# Altium PCB PCB1.PcbDoc
Units mil, origin at the board's own origin, x right, y up, seen from the top; angles counter-clockwise.
Board outline 3535 x 2720 mil, 2 copper layers (Top Layer, Bottom Layer); 29 components, 37 nets, 167 pads, 90 vias.
Unrouted connection lines stored in the file: 2.
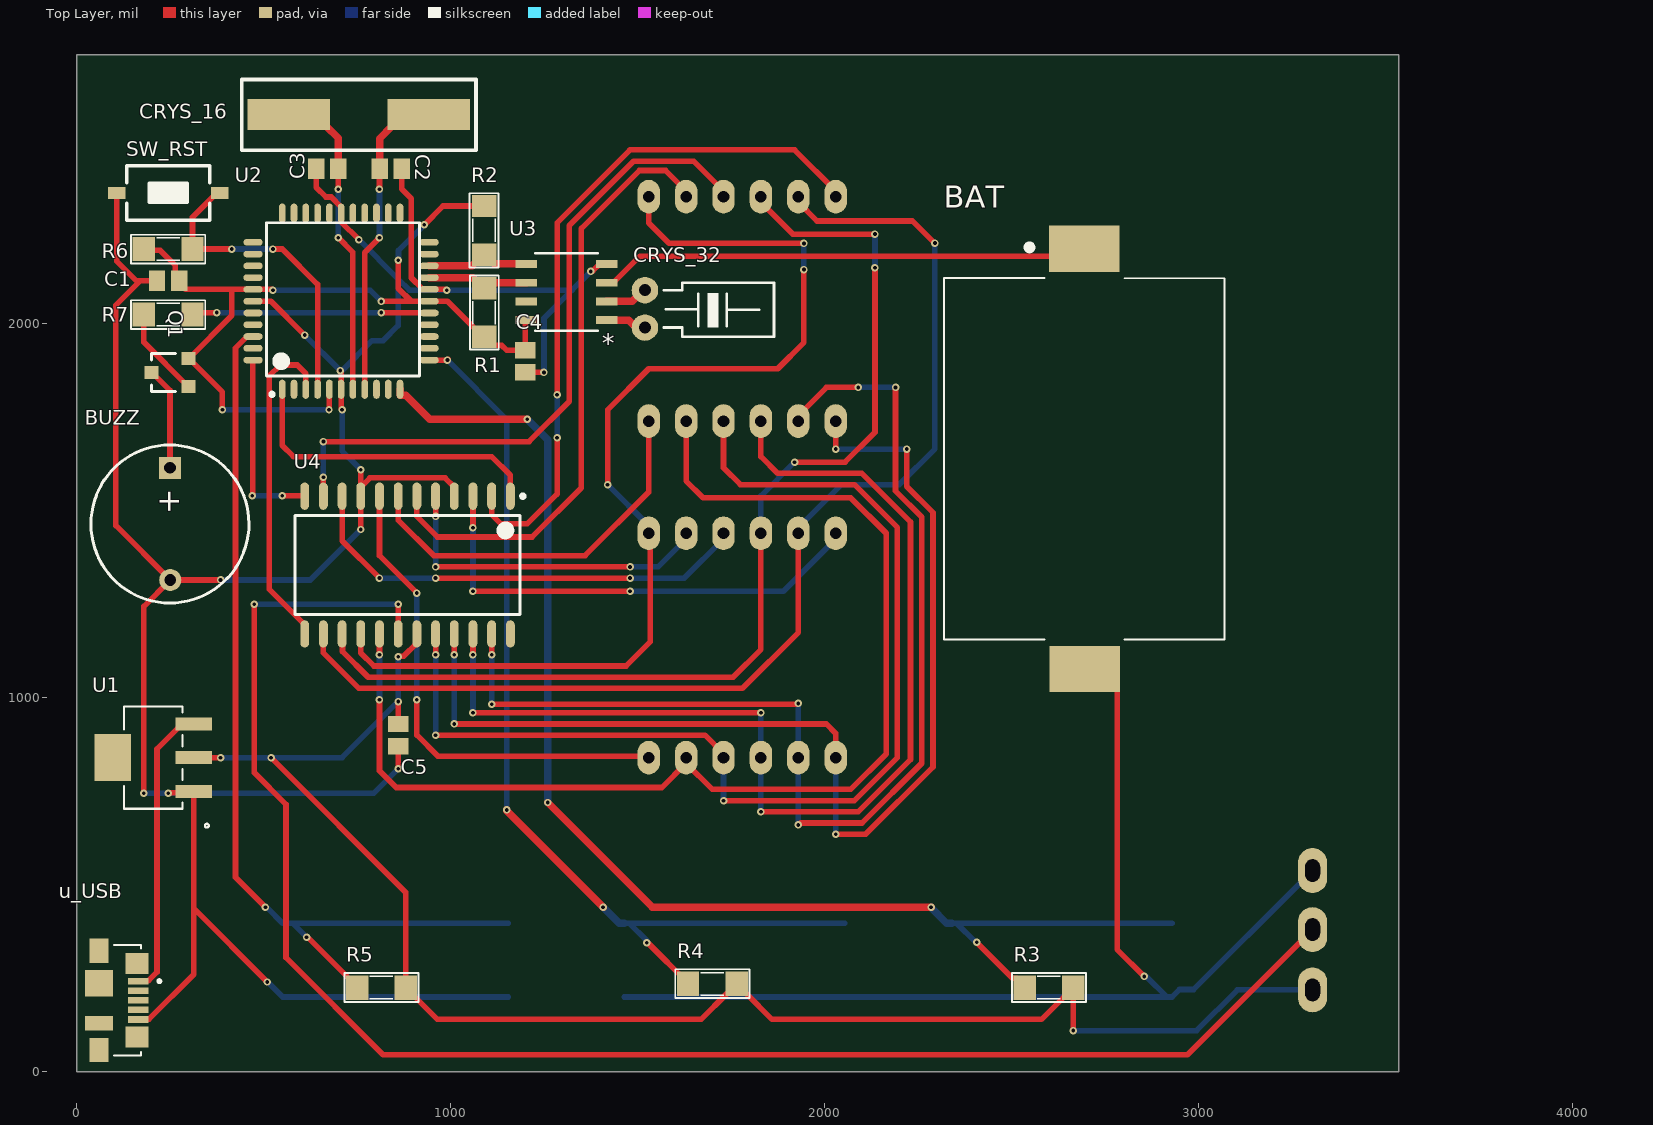
[diagram p0: Top Layer view]
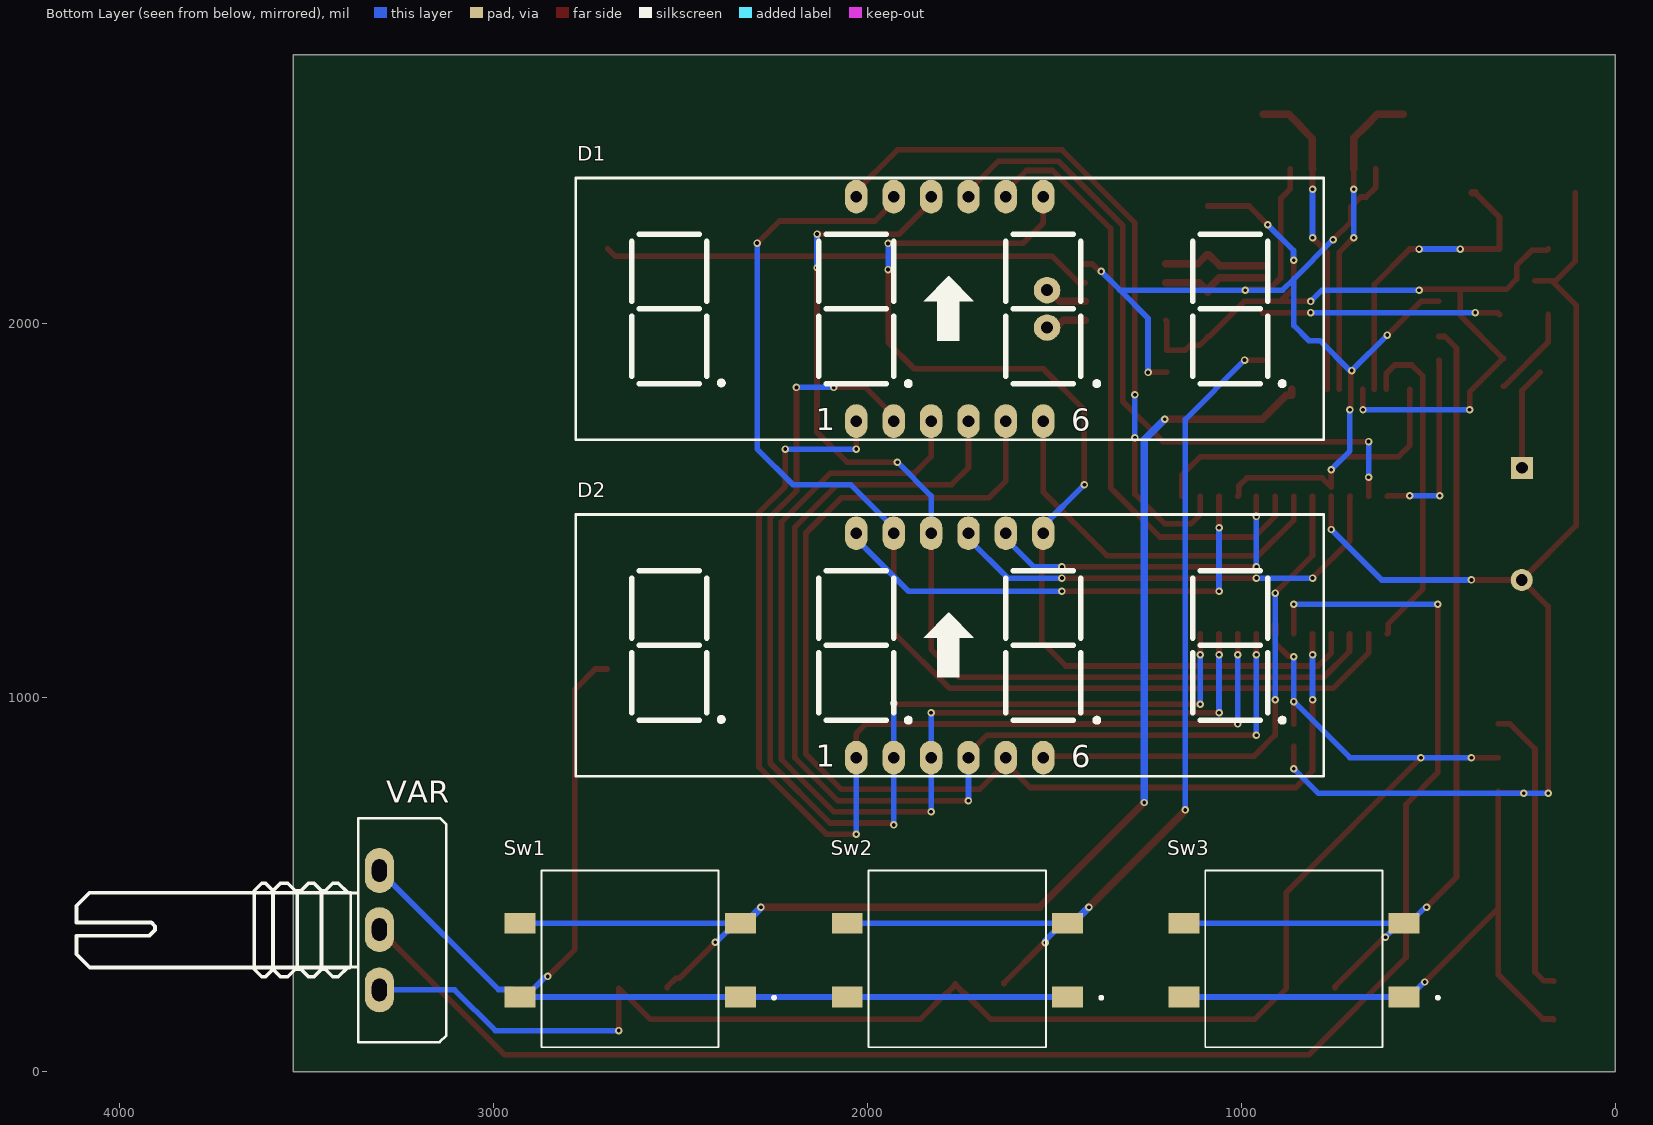
[diagram p1: Bottom Layer view, seen from below]

## Layer stack, top to bottom
Top Solder: solder mask 0.4, Solder Resist, Dk 3.5
Top Layer: signal copper 1.4
Dielectric 1: dielectric 12.6, FR-4, Dk 4.8
Bottom Layer: signal copper 1.4
Bottom Solder: solder mask 0.4, Solder Resist, Dk 3.5

## Board outline
0,0 3535,0 3535,2720 0,2720

## Design rules (kind name [scope] priority, off if disabled: settings)
Clearance [All] p1: gap=5 ignorepadtopadclearanceinfootprint=FALSE
PolygonConnect [All] p1: connectstyle=Relief reliefconductorwidth=10 reliefentries=4 polygonreliefangle="90 Angle" airgapwidth=10
RoutingVias [All] p1: holewidth=10 width=20 viastyle="Through Hole" minholewidth=10 minwidth=20 maxholewidth=10 maxwidth=20
SolderMaskExpansion [All] p1: expansion=4 istentingtop=FALSE
Width [All] p1: maxlimit=40 minlimit=10 preferedwidth=20
30 further rules are at their usual default settings.

## Components (designator, comment, footprint, x,y, rotation, side; value= is the part's Value field where it differs from the comment)
BAT "796136-1" TE_796136-1 2695,1655 r270 top
BUZZ "Buzzer" SPEAKER 250,1615 r270 top
C1 "0.1uF" C0805 245,2115 r0 top value=33p
C2 "22pF" C0805 840,2415 r0 top value=33p
C3 "22pF" C0805 670.47,2415 r180 top value=33p
C4 "0.1uF" C0805 1200,1900 r90 top value=33p
C5 "0.1uF" C0805 860,900 r90 top value=33p
CRYS_16 "16MHz" ABLS2-8.000MHZ-D4Y-T 755,2560 r0 top value=8MHz
CRYS_32 "32.768Khz" XT32k 1520,2090 r0 top value=4Mhz
D1 "Above" 7SEGQ 2030,1740 r180 bottom value="LED 7Q SEG"
D2 "Below" 7SEGQ 2030,840 r180 bottom value="LED 7Q SEG"
Q1 "SA1015" SOT23-321 250,1870 r90 top value=A1015
R1 "4k7" SM-RES-1206 1090,2095 r270 top value="R1/4W - 1K"
R2 "4k7" SM-RES-1206 1090,2185 r90 top value="R1/4W - 1K"
R3 "1k" SM-RES-1206 2535,225 r0 top value="R1/4W - 1K"
R4 "1k" SM-RES-1206 1635,235 r0 top value="R1/4W - 1K"
R5 "1k" SM-RES-1206 750,225 r0 top value="R1/4W - 1K"
R6 "1k" SM-RES-1206 310,2200 r180 top value="R1/4W - 1K"
R7 "1k" SM-RES-1206 310,2025 r180 top value="R1/4W - 1K"
Sw1 "Mode" SW_1571527-1 2634,293.58 r0 bottom (schematic designator SW1)
Sw2 "Adjust" SW_1571527-1 1759,293.58 r0 bottom (schematic designator SW2)
Sw3 "Increase" SW_1571527-1 859,293.58 r0 bottom (schematic designator SW3)
SW_RST "RST" SW1-SMD 245,2350 r0 top value="SW chip 2 pin"
U1 "AMS1117" SOT_AMS_ADS 205,840 r90 top
U2 "ATmega32A-AU" TQFP44 707.48,2060.47 r90 top
U3 "ds1307zn+" 21-0041B_8_MXM 1310,2085 r180 top
U4 "MAX7219ENG" SO24 885,1355 r270 top
u_USB "Micro-USB" MOLEX_47346-0001 60,191.02 r270 top
VAR "10K" VR-S1 3305,379 r270 bottom value="Volume 50k"

## Footprints (in the part's own frame and the unit in brackets; to place one, negate y for a bottom-side part, rotate by r counter-clockwise, add the part's x,y. Pads: shape width x height; smd on the part's side, far side on the other; paste and mask are expansions set on the pad)
7SEGQ [mil] "DIP 12 Leads; Body 48 x 20 mm; Pitch 0.5 mm"
  oval 60x90 hole 31: 1(0,0) 2(100,0) 3(200,0) 4(300,0) 5(400,0) 6(500,0) 7(500,600) 8(400,600) 9(300,600) 10(200,600) 11(100,600) 12(0,600)
  silkscreen extent -750,-50 1250,650, body extent -720,-80 1260,668, height 565
21-0041B_8_MXM [mil]
  rect 57.5x21 smd paste+0 mask+0: 1(-107.25,75) 2(-107.25,25) 3(-107.25,-25) 4(-107.25,-75) 5(107.25,-75) 6(107.25,-25) 7(107.25,25) 8(107.25,75)
  silkscreen extent -84,-104 84,104, body extent -122,-99 122,99, height 69
ABLS2-8.000MHZ-D4Y-T [mm]
  rect 5.6x2.1 smd: 1(-4.75,0) 2(4.75,0)
  silkscreen extent -7.95,-2.44 7.95,2.36
C0805 [mm] "Chip Capacitor, Body 2.0x1.3mm, IPC High Density"
  rect 1.1x1.4 smd: 1(-0.75,0) 2(0.75,0)
  body extent -1.1,-0.72 1.1,0.72, height 1.4
MOLEX_47346-0001 [mm]
  rect 0.45x1.38 smd: 1(-1.3,2.66) 2(-0.65,2.66) 3(0,2.66) 4(0.65,2.66) 5(1.3,2.66)
  rect 1.425x1.55 smd: S1(-2.487,2.575) S2(2.488,2.575)
  rect 1.65x1.3 smd: S3(-3.375,0) S6(3.375,0)
  rect 1.8x1.9 smd: S4(-1.15,0)
  rect 1x1.9 smd: S5(1.55,0)
  silkscreen extent -3.75,1 3.75,4.2, body extent -4.18,-2.93 4.18,2.5, height 2.7
SM-RES-1206 [mil]
  rect 60x65 smd: 1(0,0) 2(130,0)
  silkscreen extent -34,-38 164,39, body extent 2,-31 128,32, height 40
SO24 [mm] "SOIC, 24-Leads, Body 15.30x7.50mm, Pitch 1.27mm, IPC Medium Density"
  oval 1.85x0.6 smd: 1(-4.675,6.985) 2(-4.675,5.715) 3(-4.675,4.445) 4(-4.675,3.175) 5(-4.675,1.905) 6(-4.675,0.635) 7(-4.675,-0.635) 8(-4.675,-1.905) 9(-4.675,-3.175) 10(-4.675,-4.445) 11(-4.675,-5.715) 12(-4.675,-6.985) 13(4.675,-6.985) 14(4.675,-5.715) 15(4.675,-4.445) 16(4.675,-3.175) 17(4.675,-1.905) 18(4.675,-0.635) 19(4.675,0.635) 20(4.675,1.905) 21(4.675,3.175) 22(4.675,4.445) 23(4.675,5.715) 24(4.675,6.985)
  silkscreen extent -4.8,-7.65 3.35,7.96, body extent -5.2,-7.83 5.2,7.57, height 2.6
SOT23-321 [mm]
  rect 0.9x0.95 smd mask+0: 1(0.95,-1.25)
  rect 0.9x0.95 smd: 2(0,1.25) 3(-0.95,-1.25)
  silkscreen extent -1.3,-0.38 1.3,1.25, body extent -1.52,-1.23 1.48,1.27, height 1.06
SOT_AMS_ADS [mil]
  rect 35x98 smd paste+0 mask+0: 1(-90.16,-108.5) 2(0,-108.5) 3(90.16,-108.5)
  rect 126x98 smd paste+0 mask+0: 4(0,108.5)
  silkscreen extent -187,-148 137,78, body extent -132,-143 132,144, height 71
SPEAKER [mm]
  rect 1.5x1.5 hole 0.8: 1(0,0)
  round 1.5 hole 0.8: 2(7.62,0.013)
  silkscreen extent -1.55,-5.38 9.18,5.36, body extent -2.22,-6 13.24,6, height 3.5
SW1-SMD [mm]
  rect 1.2x0.8 smd: 1(-3.5,0) 2(3.5,0)
  silkscreen extent -2.82,-1.85 2.82,1.85, body extent -3.05,-1.85 3.05,1.85, height 2.5
SW_1571527-1 [mm]
  rect 2.1x1.4 smd: 1(-7.468,2.377) 2(7.496,2.377) 3(-7.468,-2.623) 4(7.496,-2.623)
  silkscreen extent -9.85,-6.22 6.05,5.79
TE_796136-1 [mm]
  rect 3.15x4.78 smd: 1(-13.868,0) 2(14.681,0.025)
  silkscreen extent -14.16,-9.53 12.67,9.53
TQFP44 [mm] "TQFP, 44-Leads, Body 10X10mm, Pitch 0.80mm, IPC High Density"
  oval 1.3x0.45 smd: 1(-5.981,4) 2(-5.981,3.2) 3(-5.981,2.4) 4(-5.981,1.6) 5(-5.981,0.8) 6(-5.981,0) 7(-5.981,-0.8) 8(-5.981,-1.6) 9(-5.981,-2.4) 10(-5.981,-3.2) 11(-5.981,-4) 23(5.981,-4) 24(5.981,-3.2) 25(5.981,-2.4) 26(5.981,-1.6) 27(5.981,-0.8) 28(5.981,0) 29(5.981,0.8) 30(5.981,1.6) 31(5.981,2.4) 32(5.981,3.2) 33(5.981,4)
  oval 0.45x1.3 smd: 12(-4,-5.981) 13(-3.2,-5.981) 14(-2.4,-5.981) 15(-1.6,-5.981) 16(-0.8,-5.981) 17(0,-5.981) 18(0.8,-5.981) 19(1.6,-5.981) 20(2.4,-5.981) 21(3.2,-5.981) 22(4,-5.981) 34(4,5.981) 35(3.2,5.981) 36(2.4,5.981) 37(1.6,5.981) 38(0.8,5.981) 39(0,5.981) 40(-0.8,5.981) 41(-1.6,5.981) 42(-2.4,5.981) 43(-3.2,5.981) 44(-4,5.981)
  silkscreen extent -6.45,-5.33 5.33,5.07, body extent -5.99,-5.96 6.01,6.04, height 1.05
VR-S1 [mil]
  oval 120x78.74 hole 40 slot 60 at 0 deg: 1(-159,0) 2(-1,0) 3(160,0)
  silkscreen extent -299,-810 300,179, body extent -310,-818 310,188, height 840
XT32k [mm]
  round 1.8 hole 0.813: 1(0,0) 2(0,-2.54)
  silkscreen extent 1.27,-3.17 8.76,0.51, body extent -0.15,-2.42 8.2,-0.12, height 1.95

## Part data
BAT: "BATTERY HOLDER; No. of Batteries:1; Terminal Type:Surface Mount; For Use With:CR2032 Batteries; Accessory Type:Battery Holder; Battery Size Code:2032", Package=None, Availability=Unavailable, EU_RoHS_Compliance=Compliant, MF="TE Connectivity", MP=796136-1, Number_of_Positions=2, Price=None, SnapEDA_Link=https://www.snapeda.com/parts/796136-1/TE%20Connectivity%20AMP%20Connectors/view-part/761452/?ref=snap, TE_purchase_URL=https://www.te.com/usa-en/product-796136-1.html?te_bu=Cor&te_type=disp&te_campaign=seda_glo_cor-seda-global-disp-prtnr-fy19-seda-model-bom-cta_sma-317_1&elqCampaignId=32493
C1 C2 C3 C4 C5: library part CapSMD, "Capacitor", LatestRevisionDate=17-Jul-2002, LatestRevisionNote="Re-released for DXP Platform.", PackageReference=RAD-0.3, Published=8-Jun-2000, Publisher="Altium Limited"
CRYS_16: library part ABLS2-8.000MHZ-D4Y-T, "Crystal, 8 MHz, SMD, 11.4mm x 4.7mm, 30 ppm, 18 pF, 30 ppm, ABLS2 Series", Manufacturer=ABRACON, Component Type=Crystal, Manufacturer Part No=ABLS2-8.000MHZ-D4Y-T
CRYS_32: library part XT2, "Crystal, 32.768 KHz, -40 to 85 degC, 3.2 x 1.5 x 0.9 mm SMD"
D1 D2: library part LED7Q, "Four 7 Seg Dipslay"
Q1: library part 2SA1015, "PNP 600mW, ECB"
R1 R2 R3 R4 R5 R6: library part R, "Resistor 1/4W"
R7: library part R, "Resistor for buzzer"
Sw1 Sw2 Sw3: library part 1571527-1, "Switch Tactile OFF _ON_ Round Button Gull Wing 0.05A 12VDC 0.98N SMD Bulk", Package="SMD-6 Omron Electronics", Availability=Unavailable, EU_RoHS_Compliance=Compliant, MF="TE Connectivity", MP=1571527-1, Price=None, SnapEDA_Link=https://www.snapeda.com/parts/1571527-1/TE%20Connectivity/view-part/244428/?ref=snap, TE_purchase_URL=https://www.te.com/usa-en/product-1571527-1.html?te_bu=Cor&te_type=disp&te_campaign=seda_glo_cor-seda-global-disp-prtnr-fy19-seda-model-bom-cta_sma-317_1&elqCampaignId=32493
SW_RST: library part SW2, "Switch button 2 pin"
U1: "No Description Available", Built_By=EMA_Matt, Copyright="Copyright (C) 2018 Accelerated Designs. All rights reserved", Manufacturer_Part_Number=AMS1117, RefDes=RefDes, SourceLibrary=Advanced_Monolithic_Systems_10-16-2019, Type=DEV, Vendor="Advanced Monolithic Systems"
U2: "8/16-bit AVR XMEGA A4 Microcontroller, 1.6-3.6V, 32KB + 4KB Flash, 1KB EEPROM, 4KB SRAM, 44-pin TQFP, Industrial Grade (-40°C to 85°C), Pb-Free", Supplier Part Number 1=ATXMEGA32A4-AU-ND, ComponentLink1Description="Manufacturer Link", ComponentLink1URL=http://www.atmel.com/products/avr/default.asp?, ComponentLink2Description="ATxmega16A4/32A4/64A4/128A4 Datasheet", ComponentLink2URL=http://www.atmel.com/dyn/resources/prod_documents/doc8069.pdf, ComponentLink3Description="Atmel.com Home", ComponentLink3URL=http://www.atmel.com, DatasheetVersion="revN, Feb-2010", PackageDescription="44-Pin Plastic Thin Profile Quad Flat Pack, 10 x 10 x 1.0 mm Body, 0.8 mm Pitch (TQFP)", PackageReference=44A, PackageVersion="rev.B, Oct-2001", Published=1-Apr-2010, Publisher="Altium Limited", Supplier 1=Digi-Key, Supplier 2=Farnell, Supplier 3=Mouser, Supplier Part Number 2=1748557, Supplier Part Number 3=556-ATXMEGA32A4-AU
U3: "No Description Available", Mfr_Name="Maxim Integrated Products", Copyright="Copyright (C) 2021 Ultra Librarian. All rights reserved.", Manufacturer_Part_Number=ds1307zn+, RefDes=RefDes, Type=DEV
U4: "Serially Interfaced, 8-Digit LED Display Driver", Code_JEDEC=MS-001-AF, ComponentLink1Description="Manufacturer Link", ComponentLink1URL=http://www.maxim-ic.com/, ComponentLink2Description=Datasheet, ComponentLink2URL=http://pdfserv.maxim-ic.com/en/ds/MAX7219-MAX7221.pdf, DatasheetVersion=Jul-1997, LatestRevisionDate=29-May-2009, LatestRevisionNote="Component Body Added.", PackageDescription="DIP, 24-Pin, Row Spacing 7.62 mm, Pitch 2.54 mm", PackageReference=NG24A, PackageVersion=1997, Published=16-Jan-2001, Publisher="Altium Limited"
u_USB: library part 47346-0001, "USB Connectors MICRO USB B RECPT BTTM MOUNT ASSY", Package=None, Availability=Warning, Check_prices=https://www.snapeda.com/parts/47346-0001/Molex/view-part/53503/?ref=eda, MF=Molex, MP=47346-0001, Price=None, Purchase-URL=https://pricing.snapeda.com/search/part/47346-0001/?ref=eda, SnapEDA_Link=https://www.snapeda.com/parts/47346-0001/Molex/view-part/53503/?ref=snap
VAR: library part VR-S, "Var Resistor"

## Via types
v1: diameter 20, hole 10, Top Layer to Bottom Layer, 90 vias

## Nets (pads, with @x,y where several pads share a name; then routed paths per layer and width w, separated by ;. In a path a pad name is that pad's centre, name@x,y a point inside that pad or via, vN(x,y) a via of type N, cw(c..) or ccw(c..) an arc to the next point about the centre after c; other vN are vias at no path point)
Adjust: R4.1 Sw2.3 Sw2.4 U2.12 | length 2579.1
  Top Layer w15: U2.12 v1(991.64,1902.99) v1@993.65,1905 ; v1(1525,345) 1527.5,345 1635,237.5 R4.1
  Top Layer w20: v1(1150,700) 1150,697.82 v1(1407.82,440)
  Bottom Layer w15: v1(991.64,1902.99) 1150,1744.63 v1(1150,700) ; Sw2.3 Sw2.3@1478.78,396.85 ; v1(1525,345) 1524.04,345.96 1524.04,351.59 Sw2.3@1478.78,396.85 ; Sw2.4 Sw2.3@1478.78,396.85
  Bottom Layer w20: v1(1407.82,440) 1408.07,440 1451.22,396.85 Sw2.3
Buzzer: R7.1 U2.16 | length 635.4
  Top Layer w15: R7.1 315,2030 v1(375,2030) ; v1(815,2030) 815.51,2029.49 942.44,2029.49 U2.16
  Bottom Layer w15: v1(375,2030) v1(815,2030)
CLK: U2.3 U4.13 | length 890.4
  Top Layer w15: U4.13 607.18,1173.76 607.18,1198.37 515,1290.55 515,1860 545,1890 590,1890 612.99,1867.01 U2.3
Dig0: D1.12 U4.2 | length 1878.9
  Top Layer w15: U4.2 1110,1490 1135,1465 1205,1465 1285,1545 v1(1285,1695) ; v1(1285,1810) 1285,2270 1480,2465 1920,2465 2030,2355 D1.12
  Bottom Layer w15: v1(1285,1695) v1(1285,1810)
Dig1: D1.9 U4.11 | length 1850.1
  Top Layer w15: U4.11 v1(660,1590) ; v1(660,1685) 1210,1685 1317.5,1792.5 1317.5,2262.5 1490,2435 1650,2435 1730,2355 D1.9
  Bottom Layer w15: v1(660,1590) v1(660,1685)
Dig2: D1.8 U4.6 | length 1646.7
  Top Layer w15: U4.6 910,1485 965,1430 1218.28,1430 1350,1561.72 1350,2255 1505,2410 1575,2410 1630,2355 D1.8
Dig3: D1.6 U4.7 | length 1033.8
  Top Layer w15: U4.7 860,1475 955,1380 1360,1380 1530,1550 D1.6
Dig4: D2.12 U4.3 | length 1297
  Top Layer w15: v1(1060,1285) v1(1480,1285) ; v1(1060,1455) U4.3
  Bottom Layer w15: v1(1060,1285) v1(1060,1455) ; v1(1480,1285) 1890,1285 2030,1425 D2.12
Dig5: D2.9 U4.10 | length 1241.1
  Top Layer w15: U4.10@709.25,1538.3 U4.10 710,1420 v1(810,1320) ; v1(960,1320) v1(1480,1320) ; D2.9@1729.25,1439.25 D2.9
  Bottom Layer w15: v1(810,1320) v1(960,1320) ; v1(1480,1320) 1625,1320 1730,1425 D2.9
Dig6: D2.8 U4.5 | length 905.1
  Top Layer w15: v1(960,1350) v1(1480,1350) ; v1(960,1485) U4.5
  Bottom Layer w15: v1(960,1350) v1(960,1485) ; v1(1480,1350) 1555,1350 1630,1425 D2.8
Dig7: D2.6 U4.8 | length 1325.3
  Top Layer w15: U4.8 810,1380 v1(910,1280) ; v1(910,995) 910,900 965.96,844.04 1525.96,844.04 D2.6
  Bottom Layer w15: v1(910,995) v1(910,1280)
DIN: U2.1 U4.1 | length 849.1
  Top Layer w15: U2.1 550,1675 580,1645 1110,1645 1160,1595 U4.1
GND: BAT.2 BUZZ.2 C1.1 C2.2 C3.2 C4.1 C5.1 Sw1.1 Sw1.2 Sw2.1 Sw2.2 Sw3.1 Sw3.2 SW_RST.1 U1.1 U2.6 U2.18 U2.28 U2.39 U3.4 U4.4 U4.9 u_USB.5 VAR.1 | length 10859.4
  Top Layer w15: SW_RST.1 107.2,2167.8 160,2115 170,2115 ; u_USB.5 166.08,141.2 194.19,141.2 313.5,260.51 313.5,435 ; v1(180,745) 180,1244.5 BUZZ.2 ; C1.1 170,2115 ; v1(245,745) 245.96,745.96 309.61,745.96 U1.1 313.5,435 ; v1(385,1315) BUZZ.2 ; U2.39 519.53,2060.47 v1(610,1970) ; v1(510,240) 315,435 313.5,435 ; C3.2 640.94,2364.94 666.82,2339.07 681.09,2339.07 707.48,2312.68 U2.28 707.48,2272.52 v1(755,2225) ; v1(705,1875) 705,1873.65 707.48,1871.17 U2.6 707.48,1773.87 710,1771.35 v1(710,1770) ; v1(760,1450) U4.9 ; U4.9@760,1563.66 784.31,1587.97 985.69,1587.97 1007.18,1566.48 1007.18,1541.87 U4.4 ; U4.9@760,1566.48 v1(760,1610) ; v1(860,810) C5.1 ; C2.2 869.53,2360.47 895,2335 895,2123.19 925.33,2092.86 942.06,2092.86 U2.18 986.68,2091.97 988.65,2090 v1(990,2090) ; C4.1 1200.24,1870.24 1249.76,1870.24 v1(1249.88,1870.12) ; v1(1375,2140) 1375.96,2140.96 1379.96,2140.96 1399,2160 U3.4 ; BAT.2 2728.09,1077 2782.59,1022.49 2782.59,327.41 v1(2855,255) ; 170,2115 105,2050 105,1460.5 BUZZ.2
  Bottom Layer w15: v1(180,745) v1(245,745) 795,745 v1(860,810) ; v1(385,1315) 625,1315 v1(760,1450) ; v1(510,240) 511.22,240 551.22,200 Sw3.1 Sw3.2 ; v1(610,1970) v1(705,1875) 705.96,1875.96 710.96,1875.96 790,1955 820,1955 860,1995 860,2120 ; v1(710,1770) 710,1660 v1(760,1610) ; v1(755,2225) 860,2120 ; v1(1249.88,1870.12) 1249.88,2014.88 1325,2090 ; v1(1375,2140) 1325,2090 ; Sw2.1 Sw2.2 Sw1.1 Sw1.2@2915.35,200 ; v1(2855,255) 2855.96,254.04 2861.31,254.04 Sw1.2@2915.35,200 ; VAR.1 3305,534.62 3275.56,505.17 3272.17,505.17 2987.06,220.06 2949.19,220.06 Sw1.2 Sw1.2@2915.35,200 ; 860,2120 890,2090 v1(990,2090) 1325,2090
Incr: R5.1 Sw3.3 Sw3.4 U2.42 | length 2499.2
  Top Layer w15: U2.42 456.01,1965.98 425,1934.97 425,520 v1(505,440) ; v1(615,360) 615.96,359.04 618.46,359.04 750,227.5 R5.1
  Bottom Layer w15: v1(505,440) 505.96,439.04 509.03,439.04 551.22,396.85 Sw3.3 Sw3.3@578.78,396.85 ; v1(615,360) 615,360.63 Sw3.3@578.78,396.85 ; Sw3.4 Sw3.3@578.78,396.85
LOAD: U2.44 U4.12 | length 504.2
  Top Layer w15: v1(470,1540) 470.96,1540.96 470.96,1901.94 U2.44 ; v1(550,1540) 609.06,1540 U4.12
  Bottom Layer w15: v1(470,1540) v1(550,1540)
Mode: R3.1 Sw1.3 Sw1.4 U2.11 | length 3487.4
  Top Layer w15: v1(2407.02,345.96) 2502.97,250 2512.5,250 2535,227.5 R3.1
  Top Layer w20: U2.11 864.96,1810.55 866.1,1809.41 880.55,1809.41 944.96,1745 v1(1205,1745) ; v1(1260,720) 1540,440 v1(2285,440)
  Bottom Layer w15: Sw1.3 Sw1.3@2353.78,396.85 ; v1(2407.02,345.96) 2404.67,345.96 Sw1.3@2353.78,396.85 ; Sw1.4 Sw1.3@2353.78,396.85
  Bottom Layer w20: v1(1205,1745) 1260,1690 v1(1260,720) ; v1(2285,440) 2285,438.07 2326.22,396.85 Sw1.3
NetBAT_1: BAT.1 U3.3 | length 1315.4
  Top Layer w15: U3.3 1435.5,2110 1506.52,2181.02 2675.02,2181.02 BAT.1
NetBUZZ_1: BUZZ.1 Q1.2 | length 276
  Top Layer w15: Q1.2 201.77,1870 250,1821.77 BUZZ.1
NetCRYS_32_1: CRYS_32.1 U3.2 | length 111
  Top Layer w20: U3.2 1486.24,2060 1506.24,2080 CRYS_32.1@1520,2080
NetCRYS_32_2: CRYS_32.2 U3.1 | length 115.2
  Top Layer w20: U3.1 1476.24,2010 1506.24,1980 CRYS_32.2@1520,1980
NetQ1_3: Q1.3 R7.2 | length 242.4
  Top Layer w15: R7.2 180,1950.83 298.23,1832.6 Q1.3
NetU1_3: U1.3 u_USB.1 | length 783.3
  Top Layer w15: u_USB.1 166.08,243.56 192.22,243.56 215,266.34 215,863.16 282,930.16 U1.3
NetU4_18: U4.18 VAR.2 | length 4437.7
  Top Layer w15: v1(475,1250) 475,800 560,715 560,305 820,45 2970,45 3272.17,347.17 3275.56,347.17 3305,376.62 VAR.2 ; U4.18 v1(860,1250)
  Bottom Layer w15: v1(475,1250) v1(860,1250)
Reset: R6.1 SW_RST.2 U2.4 | length 838.9
  Top Layer w15: SW_RST.2@374.92,2350 310,2285.08 R6.1 v1(415,2200) ; v1(525,2200) 550,2200 644.49,2105.51 U2.4
  Top Layer w20: SW_RST.2@374.92,2350 SW_RST.2
  Bottom Layer w15: v1(415,2200) v1(525,2200)
SCL: R1.1 U2.19 U3.6 | length 289.4
  Top Layer w20: U2.19 1059.04,2123.46 1090,2092.5 R1.1@1090,2087.5 ; R1.1@1090,2085 R1.1@1090,2087.5 ; U3.6 1112.5,2110 R1.1@1090,2087.5
SDA: R2.1 U2.20 U3.5 | length 282.6
  Top Layer w20: U2.20 1057.46,2154.96 1087.5,2185 R2.1 1092.5,2185 1117.5,2160 U3.5
segA: D1.11 D2.11 U4.14 | length 3131
  Top Layer w15: U4.14 660,1120 755,1025 1780,1025 1930,1175 D2.11 ; D1.11 1930,2325 1980,2275 2235,2275 2294.04,2215.96 v1(2295.29,2215.96)
  Bottom Layer w15: D2.11 1930,1455 2045,1570 2200,1570 2295.29,1665.29 v1(2295.29,2215.96)
segB: D1.7 D2.7 U4.16 | length 2906.6
  Top Layer w15: U4.16 760,1120.12 795.12,1085 1469.52,1085 1534.52,1150 1534.52,1435.48 D2.7 ; v1(1420,1570) 1420,1770 1530,1880 1875,1880 1945,1950 v1(1945,2145) ; D1.7 1530,2270 1585,2215 v1(1945,2215)
  Bottom Layer w15: v1(1420,1570) 1530,1460 D2.7 ; v1(1945,2145) v1(1945,2215)
segC: D1.4 D2.4 U4.20 | length 2970.6
  Top Layer w15: v1(960,900) 1680,900 1730,850 D2.4 ; v1(960,1115) U4.20 ; v1(1730,725) 2080,725 2195,840 2195,1455 2080,1570 1775,1570 1730,1615 D1.4
  Bottom Layer w15: v1(960,900) v1(960,1115) ; v1(1730,725) D2.4
segD: D1.2 D2.2 U4.23 | length 3072.9
  Top Layer w15: v1(1110,982.5) 1926.15,982.5 1928.65,985 v1(1930,985) ; v1(1110,1115) U4.23 ; v1(1930,660) 1931.35,660 1936.53,665.18 2100.18,665.18 2260,825 2260,1483.46 2190,1553.46 v1(2190,1830) ; D1.2 1930,1755 2005,1830 v1(2090,1830)
  Bottom Layer w15: v1(1110,982.5) v1(1110,1115) ; v1(1930,660) D2.2 v1(1930,985) ; v1(2090,1830) v1(2190,1830)
segDP: D1.3 D2.3 U4.22 | length 2906.4
  Top Layer w15: v1(1060,960) v1(1830,960) ; v1(1060,1115) U4.22 ; v1(1830,695) 2090,695 2230,835 2230,1470 2100,1600 1875,1600 1830,1645 D1.3
  Bottom Layer w15: v1(1060,960) v1(1060,1115) ; v1(1830,695) D2.3 v1(1830,960)
segE: D1.1 D2.1 U4.21 | length 3019.9
  Top Layer w15: v1(1010,930) 2005,930 2030,905 D2.1 ; v1(1010,1115) U4.21 ; v1(2030,635) 2110,635 2290,815 2290,1495 2220,1565 v1(2220,1665) ; v1(2030,1665) D1.1
  Bottom Layer w15: v1(1010,930) v1(1010,1115) ; v1(2030,635) D2.1 ; v1(2030,1665) v1(2220,1665)
segF: D1.10 D2.10 U4.15 | length 2897
  Top Layer w15: U4.15 711.09,1169.85 711.09,1123.91 780,1055 1755.6,1055 1830,1129.4 D2.10 ; D1.10 1830,2325 1915,2240 v1(2135,2240) ; v1(1920,1630) 2055,1630 2135,1710 v1(2135,2150)
  Bottom Layer w15: D2.10 1830,1540 v1(1920,1630) ; v1(2135,2150) v1(2135,2240)
segG: D1.5 D2.5 U4.17 | length 3192.8
  Top Layer w15: v1(810,995) 810,805 855,760 1565,760 D2.5@1630,825 ; v1(810,1115) U4.17 ; D2.5 D2.5@1630,825 ; D1.5 1630,1580 1675,1535 2070,1535 2165,1440 2165,850 2070,755 1700,755 D2.5@1630,825
  Bottom Layer w15: v1(810,995) v1(810,1115)
VCC_5V: C1.2 C4.2 C5.2 Q1.1 R1.2 R2.2 R3.2 R4.2 R5.2 R6.2 U1.2 U2.5 U2.17 U2.38 U3.8 U4.19 VAR.3 | length 6812
  Top Layer w15: R6.2 183.71,2196.29 223.71,2196.29 264.25,2155.75 264.25,2119.37 291.65,2091.97 415,2091.97 ; Q1.1 Q1.1@300.2,1907.4 ; U1.2 v1(385,840) ; v1(390,1770) 390,1817.6 Q1.1@300.2,1907.4 ; v1(520,840) 880,480 R5.2 880,222.5 902.5,200 905,200 965,140 1670,140 1740,210 1742.5,210 R4.2@1765,232.5 ; v1(525,2090) 523.65,2090 521.68,2091.97 U2.38 415,2091.97 ; v1(675,1770) 675.49,1770.49 675.49,1824.51 U2.5 ; v1(815,2060) 815.24,2060.24 895,2060.24 ; C5.2 v1(860,990) ; v1(860,1110) 860.96,1110.96 874.62,1110.96 910,1146.34 U4.19 ; v1(860,2170) 860,2095.24 895,2060.24 ; v1(930,2265) 980,2315 R2.2 ; U3.8 1200,2007.25 C4.2 1149.94,1929.53 1136.97,1942.5 1112.5,1942.5 R1.2 1087.5,1965 992.03,2060.47 U2.17 942.72,2060.24 895,2060.24 ; R4.2 R4.2@1765,232.5 ; v1(2665,110) 2665,222.5 2642.5,200 2640,200 2580,140 1860,140 1790,210 1787.5,210 R4.2@1765,232.5 ; Q1.1@300.2,1907.4 415,2022.21 415,2091.97
  Top Layer w20: U4.19 U4.19@910,1195
  Bottom Layer w15: v1(385,840) v1(520,840) 710,840 v1(860,990) v1(860,1110) ; v1(390,1770) v1(675,1770) ; v1(525,2090) 785,2090 v1(815,2060) ; v1(860,2170) 860.96,2170.96 860.96,2195.96 v1(930,2265) ; v1(2665,110) 2995,110 3104,219 VAR.3
XTAL1: C2.1 CRYS_16.2 U2.8 | length 846.4
  Top Layer w15: U2.8 770.47,2190.47 v1(810,2230) ; v1(810,2360) C2.1@810,2414.53
  Top Layer w20: C2.1@810,2414.53 C2.1 810.47,2495.47 841.77,2526.77 841.77,2528.66 873.11,2560 CRYS_16.2
  Bottom Layer w15: v1(810,2230) v1(810,2360)
XTAL2: C3.1 CRYS_16.1 U2.7 | length 846.2
  Top Layer w15: v1(700,2230) 738.98,2191.02 U2.7 ; v1(700,2360) C3.1
  Top Layer w20: CRYS_16.1 636.89,2560 668.23,2528.66 700,2496.89 C3.1
  Bottom Layer w15: v1(700,2230) v1(700,2360)
pads on no net: U1.4 U2.2 U2.9 U2.10 U2.13 U2.14 U2.15 U2.21 U2.22 U2.23 U2.24 U2.25 U2.26 U2.27 U2.29 U2.30 U2.31 U2.32 U2.33 U2.34 U2.35 U2.36 U2.37 U2.40 U2.41 U2.43 U3.7 U4.24 u_USB.2 u_USB.3 u_USB.4 u_USB.S1 u_USB.S2 u_USB.S3 u_USB.S4 u_USB.S5 u_USB.S6

## Text inside footprints (layer, text, board x,y; h text height)
BAT: Mechanical 13 "-" at 2669,1230 h56 r270; Mechanical 13 "+" at 2673,2085 h56 r270
BUZZ: Top Overlay "+" at 222,1559.5 h60 r270
D1: Bottom Overlay "6" at 1455,1714 h60; Bottom Overlay "1" at 2138,1716 h60
D2: Bottom Overlay "6" at 1455,814 h60; Bottom Overlay "1" at 2138,816 h60
U3: Mechanical 13 "*" at 1386,2039.5 h50 r180; Top Overlay "*" at 1439.75,1994 h50 r180
u_USB: Mechanical 13 "PCB EDGE" at 10.79,13.86 h16 r270